# EAGLE board flash_mem (EAGLE 8.4.3)
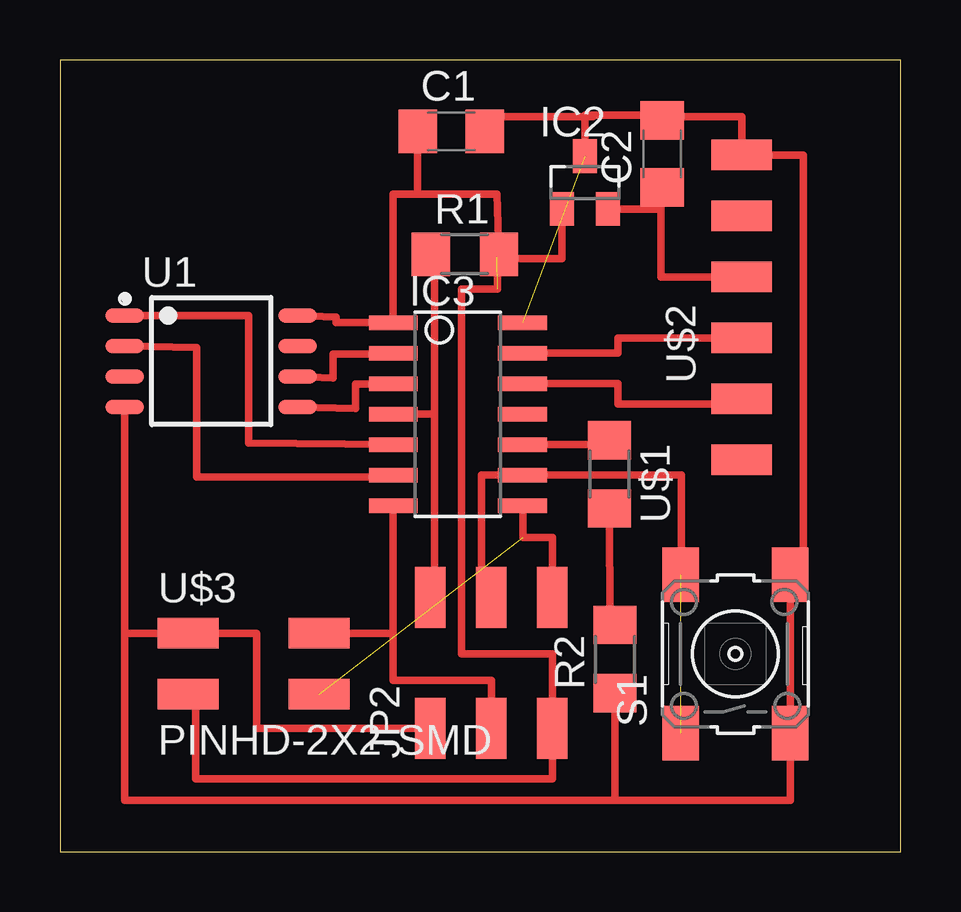
[diagram p0: board, top side]
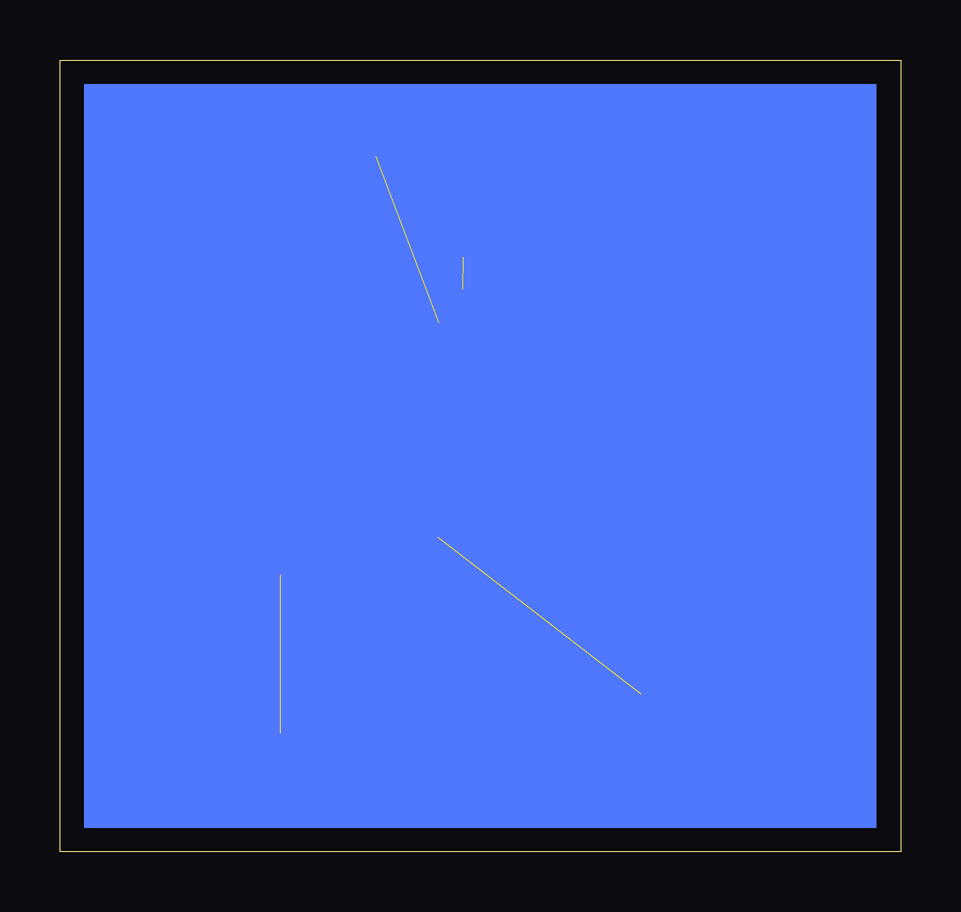
[diagram p1: board, bottom side, seen from below]

Size 35.05 x 33.02 mm. Coordinates in mm from the lower left corner, seen from the top.
Outline: 0,0 35.05,0 35.05,33.02 0,33.02 0,0
Copper layers (1*16): Top 0.035mm / dielectric 1.5mm / Bottom 0.035mm
Design rules "default": minimum track width 6mil, minimum drill 0.35mm, track to track 6mil, track to pad 6mil, pad to pad 6mil, via to via 6mil, smd to smd 6mil, copper to edge 40mil, drill to drill 6mil, minimum pad ring 10mil, minimum via ring 8mil, stop-mask expansion 4mil, vias tented up to drill 0mil, thermal gap 10mil

## Footprints (pad centres in the part's own frame; a part is rotated, then mirrored left to right if it is on the bottom)
C1206 = smd 1.6 x 1.8: 1 -1.4,0; 2 1.4,0
SOT23 = smd 1 x 1.4: 1 -0.95,-1.1; 2 0.95,-1.1; 3 0,1.1
SOIC14_MOD = smd 0.61 x 2.032: 1 -3.81,-2.692; 2 -2.54,-2.692; 3 -1.27,-2.692; 4 0,-2.692; 5 1.27,-2.692; 6 2.54,-2.692; 7 3.81,-2.692; 8 3.81,2.692; 9 2.54,2.692; 10 1.27,2.692; 11 0,2.692; 12 -1.27,2.692; 13 -2.54,2.692; 14 -3.81,2.692
2X03SMD = smd 2.54 x 1.27: 1 -2.54,2.54; 2 2.92,2.54; 3 -2.54,0; 4 2.92,0; 5 -2.54,-2.54; 6 2.92,-2.54
R1206 = smd 1.6 x 1.803: 1 -1.422,0; 2 1.422,0
6MM_SWITCH = smd 2.286 x 1.524: 1 -3.302,2.286; 2 3.302,2.286; 3 -3.302,-2.286; 4 3.302,-2.286
SOIC127P790X216-8N = smd 1.6 x 0.6: 1 -3.6,1.905; 2 -3.6,0.635; 3 -3.6,-0.635; 4 -3.6,-1.905; 5 3.6,-1.905; 6 3.6,-0.635; 7 3.6,0.635; 8 3.6,1.905
LED1206 = smd 1.6 x 1.803: 1 -1.422,0; 2 1.422,0
1X06SMD = smd 2.54 x 1.27: 1 0,6.35; 2 0,3.81; 3 0,1.27; 4 0,-1.27; 5 0,-3.81; 6 0,-6.35
2X02SMD = smd 2.54 x 1.27: 1 -2.54,1.27; 2 2.92,1.27; 3 -2.54,-1.27; 4 2.92,-1.27

## Placement (x,y rotation side)
C1  [C1206]  16.31,30.04 0 top
C2  [C1206]  25.1,29.1 90 top
IC2  [SOT23]  21.89,27.91 0 top
IC3  ATTINY44  [SOIC14_MOD]  16.58,18.25 270 top
JP2  [2X03SMD]  17.98,7.7 90 top
R1  [R1206]  16.88,24.92 0 top
R2  [R1206]  23.14,8.04 90 top
S1  [6MM_SWITCH]  28.16,8.26 90 top
U1  W25Q32JVSSIQ  [SOIC127P790X216-8N]  6.31,20.47 0 top
U$1  LED  [LED1206]  22.9,15.75 270 top
U$2  FTDI-SMD-HEADER  [1X06SMD]  28.42,22.71 0 top
U$3  PINHD-2X2-SMD  [2X02SMD]  7.89,7.85 0 top

## Library data of the parts
C1 C2 IC2 IC3 JP2 R1 R2 S1 U$1-U$3 = fab 
U1 = W25Q32JVSSIQ; AVAILABILITY: Good; DESCRIPTION: NOR Flash Serial-SPI 3V 32Mbit 32M x 1bit 8-Pin SOIC; MF: Winbond; MP: W25Q32JVSSIQ; PACKAGE: SOIC-8 Winbond; PRICE: 0.44 USD

## Nets
5V: C2.1 IC2.2 U$2.3
CLK: IC3.2 U1.6
CS: IC3.5 U1.1
DI: IC3.3 U1.5
DO: IC3.6 U1.2
GND: C1.2 C2.2 IC2.3 IC3.14 JP2.1 R2.1 S1.3 S1.4 U1.4 U$2.1 U$3.1
LED: IC3.10 U$1.1
MISO/SIG2: IC3.8 JP2.6 U$3.4
MOSI/SIG1: IC3.7 JP2.3 U$3.2
N$1: R2.2 U$1.2
RST: IC3.4 JP2.2 R1.1
RX: IC3.12 U$2.5
SCK/BUTTON: IC3.9 JP2.4 S1.1 S1.2
TX: IC3.13 U$2.4
VCC: C1.1 IC2.1 IC3.1 JP2.5 R1.2 U1.8 U$3.3

## Tracks (layer width: path | path; a pad name or v marks a point on that pad's centre or on a via)
5V
  Top 0.305: U$2.3 25.05,23.98 25.05,26.81 | C2.1 25.05,27.7 25.05,26.81 | IC2.2 25.05,26.81
CLK
  Top 0.305: U1.6 11.39,19.76 11.39,20.76 13.89,20.76 IC3.2
CS
  Top 0.305: U1.1 7.86,22.37 | 7.86,22.37 4.43,22.35 | 7.86,22.37 7.86,17.05 IC3.5
DI
  Top 0.305: U1.5 12.32,18.49 12.32,19.5 13.89,19.5 IC3.3
DO
  Top 0.305: U1.2 5.7,21.03 5.7,15.64 13.89,15.64 IC3.6
GND  (1 unrouted)
  Top 0.305: C2.2 25.1,30.66 25.39,30.66 | 25.39,30.66 28.42,30.66 U$2.1 30.99,29.06 30.99,11.56 S1.4 S1.3 30.45,2.16 23.14,2.16 | IC2.3 21.89,30.73 22.23,30.73 | 25.39,30.66 25.39,30.73 22.23,30.73 | 2.71,9.12 U1.4 | 4.49,9.12 2.71,9.12 | 4.49,9.12 U$3.1 | JP2.1 8.2,5.16 8.2,9.11 4.49,9.11 4.49,9.12 | C1.2 17.89,30.04 17.89,30.66 22.23,30.66 22.23,30.73 | R2.1 23.14,2.16 | 23.14,2.16 23.14,2.21 23.11,2.16 2.71,2.16 2.71,9.12
LED
  Top 0.305: IC3.10 22.93,16.98 U$1.1
MISO/SIG2  (1 unrouted)
  Top 0.305: JP2.6 20.52,13.11 19.3,13.11 19.3,14.44 IC3.8
MOSI/SIG1
  Top 0.305: JP2.3 17.98,7.15 13.89,7.15 13.89,9.11 | 13.89,9.11 IC3.7 | U$3.2 13.89,9.11
N$1
  Top 0.305: U$1.2 22.93,9.47 R2.2
RST
  Top 0.305: IC3.4 15.62,18.25 | JP2.2 15.62,10.62 15.62,18.25 | 15.62,18.25 15.62,24.89 16,24.89 16,24.92 R1.1
RX
  Top 0.305: IC3.12 23.26,19.52 23.26,18.68 28.42,18.68 U$2.5
SCK/BUTTON  (1 unrouted)
  Top 0.305: JP2.4 17.98,11.5 17.58,11.5 17.58,15.71 IC3.9 25.91,15.71 | 25.91,15.71 | 25.91,15.71 25.91,11.56 S1.2
TX
  Top 0.305: IC3.13 23.26,20.79 23.26,21.43 U$2.4
VCC  (1 unrouted)
  Top 0.305: IC3.1 | U1.8 11.5,22.3 11.5,22.07 IC3.1 | IC3.1 13.89,27.42 14.91,27.42 | U$3.3 5.66,6.58 5.66,3.06 20.52,3.06 JP2.5 20.52,8.25 16.73,8.25 16.73,23.48 18.24,23.48 18.21,25.03 | IC2.1 20.94,24.74 17.69,24.74 17.69,24.81 18.23,24.81 R1.2 18.23,27.42 14.91,27.42 | C1.1 14.91,27.42
(copper drawn outside any net)
  shapes: Bottom area x1